# EAGLE board DCCInterfaceShieldNano (EAGLE 9.6.2)
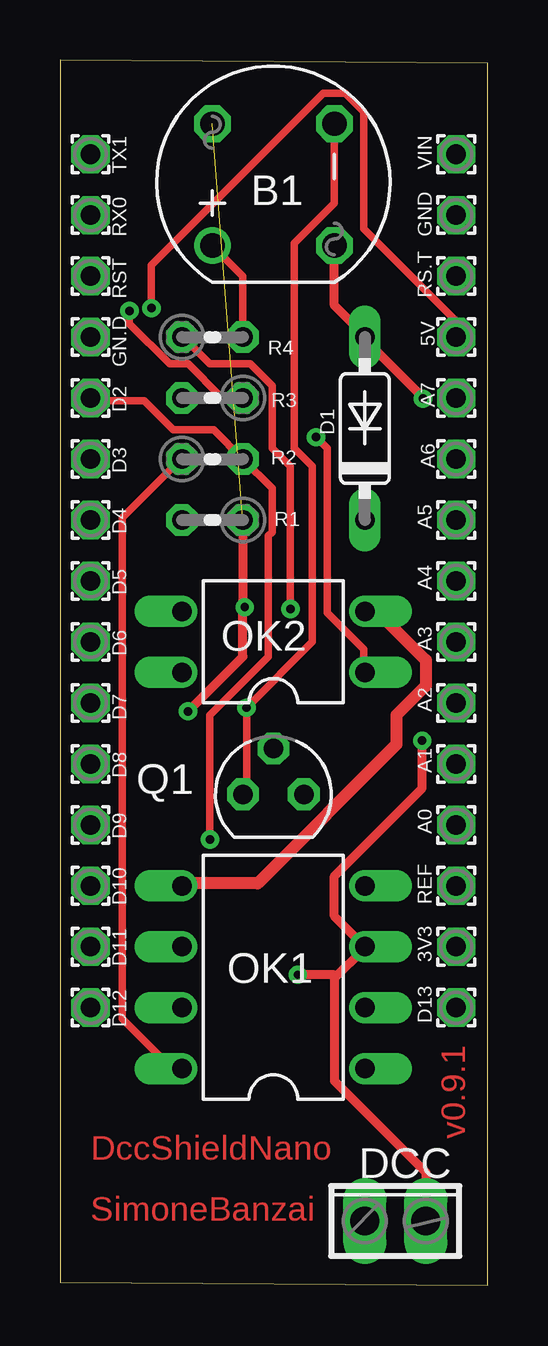
[diagram p0: board, top side]
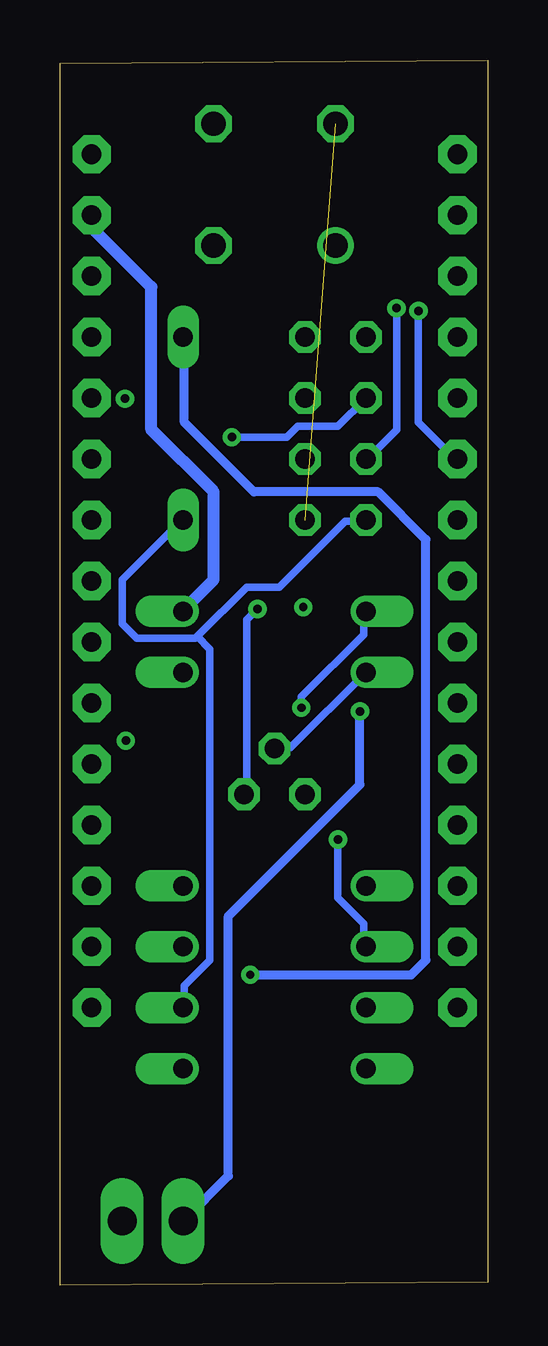
[diagram p1: board, bottom side, seen from below]

Size 17.83 x 51.04 mm. Coordinates in mm from the lower left corner, seen from the top.
Outline: 0,0.13 17.83,0 17.83,50.92 0,51.04 0,0.13
Copper layers (1*16): Top 0.035mm / dielectric 1.5mm / Bottom 0.035mm
Design rules "default": minimum track width 6mil, minimum drill 0.35mm, track to track 6mil, track to pad 6mil, pad to pad 6mil, via to via 6mil, smd to smd 6mil, copper to edge 40mil, drill to drill 6mil, minimum pad ring 10mil, minimum via ring 8mil, stop-mask expansion 4mil, vias tented up to drill 0mil, thermal gap 10mil
Net classes: 0 default: width 0.305 mm, clearance 0.305 mm; 1 GND: width 0.508 mm, clearance 0.305 mm; 2 DCC: width 0.381 mm, clearance 0.305 mm

## Footprints (pad centres in the part's own frame; a part is rotated, then mirrored left to right if it is on the bottom)
1,6/0,8 = drill 0.813 pad 1.6 octagon: 1 0,0
RB1A = drill 1.016: + -2.54,2.54 | drill 1.016 octagon: - 2.54,-2.54; AC1 2.54,2.54; AC2 -2.54,-2.54
DO35-7 = drill 0.813 long: A 3.81,0; C -3.81,0
2POL254 = drill 1.2 long: 1 -1.27,0; 2 1.27,0
DIL08 = drill 0.813 offset: 1 -3.81,-3.81; 2 -1.27,-3.81; 3 1.27,-3.81; 4 3.81,-3.81; 5 3.81,3.81; 6 1.27,3.81; 7 -1.27,3.81; 8 -3.81,3.81
DIL04 = drill 0.813 offset: 1 -1.27,-3.81; 2 1.27,-3.81; 3 1.27,3.81; 4 -1.27,3.81
SOT54A = drill 0.813 octagon: B 0,1.905; C -1.27,0; E 1.27,0
0204V = drill 0.813 octagon: 1 -1.27,0; 2 1.27,0

## Placement (x,y rotation side)
3V3  [1,6/0,8]  16.51,14.1 0 top
5V  [1,6/0,8]  16.51,39.5 0 top
A0  [1,6/0,8]  16.51,19.18 0 top
A1  [1,6/0,8]  16.51,21.72 0 top
A2  [1,6/0,8]  16.51,24.26 0 top
A3  [1,6/0,8]  16.51,26.8 0 top
A4  [1,6/0,8]  16.51,29.34 0 top
A5  [1,6/0,8]  16.51,31.88 0 top
A6  [1,6/0,8]  16.51,34.42 0 top
A7  [1,6/0,8]  16.51,36.96 0 top
B1  [RB1A]  8.89,45.85 90 top
D1  1N4148DO35-7  [DO35-7]  12.7,35.69 90 top
D2  [1,6/0,8]  1.27,36.96 0 top
D3  [1,6/0,8]  1.27,34.42 0 top
D4  [1,6/0,8]  1.27,31.88 0 top
D5  [1,6/0,8]  1.27,29.34 0 top
D6  [1,6/0,8]  1.27,26.8 0 top
D7  [1,6/0,8]  1.27,24.26 0 top
D8  [1,6/0,8]  1.27,21.72 0 top
D9  [1,6/0,8]  1.27,19.18 0 top
D10  [1,6/0,8]  1.27,16.64 0 top
D11  [1,6/0,8]  1.27,14.1 0 top
D12  [1,6/0,8]  1.27,11.56 0 top
D13  [1,6/0,8]  16.51,11.56 0 top
DCC  [2POL254]  13.97,2.67 0 top
GN.D  [1,6/0,8]  1.27,39.5 0 top
GND  [1,6/0,8]  16.51,44.58 0 top
OK1  6N137  [DIL08]  8.89,12.83 90 top
OK2  PC817  [DIL04]  8.89,26.8 90 top
Q1  BC557  [SOT54A]  8.89,20.45 0 top
R1  1k5  [0204V]  6.35,31.88 180 top
R2  10k  [0204V]  6.35,34.42 0 top
R3  10k  [0204V]  6.35,36.96 180 top
R4  100  [0204V]  6.35,39.5 0 top
REF  [1,6/0,8]  16.51,16.64 0 top
RS.T  [1,6/0,8]  16.51,42.04 0 top
RST  [1,6/0,8]  1.27,42.04 0 top
RX0  [1,6/0,8]  1.27,44.58 0 top
TX1  [1,6/0,8]  1.27,47.12 0 top
VIN  [1,6/0,8]  16.51,47.12 0 top

## Library data of the parts
3V3 5V A0 A1-A7 D2-D13 GN.D GND REF RS.T RST RX0 TX1 VIN = wirepad
B1 = rectifier
D1 = diode
DCC = con-phoenix-254; OC_FARNELL: unknown; OC_NEWARK: unknown
OK1 = optocoupler; MPN: 6N137; OC_FARNELL: 1328376; OC_NEWARK: 52M1895
OK2 = optocoupler; MPN: PC817X4J000F; OC_FARNELL: 9707727; OC_NEWARK: 97K7059
Q1 = transistor-small-signal
R1-R4 = rcl; SPICEPREFIX: R

## Nets
GND [GND]: GND.1 OK1.5 OK2.2
N$1: 5V.1 OK1.8 R2.1
N$3: D1.C OK1.2 R1.2
N$5: D2.1 OK1.6 R2.2
N$6 [DCC]: B1.AC1 DCC.1 R1.1
N$7: OK2.1 R3.2
N$8: OK2.4 Q1.B
N$9: B1.+ R4.2
N$10: B1.- OK2.3 Q1.C
N$11: Q1.E R4.1
N$12: D3.1 R3.1
N$13 [DCC]: B1.AC2 D1.A DCC.2 OK1.3

## Tracks (layer width: path | path; a pad name or v marks a point on that pad's centre or on a via)
GND
  Top 0.508: OK1.5 5.18,16.74 8.23,16.74 14.02,22.53 14.02,23.75 15.24,24.97 15.24,26.04 13.26,28.02 12.8,28.02 OK2.2
  Bottom 0.508: GND.1 16.46,44.47 16.46,44.02 14.02,41.58 14.02,35.64 11.43,33.05 11.43,29.39 12.65,28.17 OK2.2
N$1  (via drill 0.35)
  Top 0.305: OK1.8 5.03,9.12 4.57,9.12 2.59,11.1 2.59,31.98 5.03,34.42 R2.1 | v3.81,40.7 3.81,42.49 10.97,49.66 11.89,49.66 12.65,48.89 12.65,44.02 16.46,40.21 16.46,39.6 5V.1
  Bottom 0.305: v3.81,40.7 3.81,35.64 5.03,34.42 R2.1
N$3
  Bottom 0.305: 12.12,27.03 12.19,26.95 14.63,26.95 15.24,27.56 15.24,29.39 12.8,31.83 D1.C | 12.12,27.03 10.06,29.08 8.69,29.08 5.94,31.83 5.18,31.83 R1.2 | 12.12,27.03 11.58,26.49 11.58,13.54 12.65,12.47 12.65,11.56 OK1.2
N$5  (via drill 0.35)
  Top 0.305: v6.25,18.57 6.25,23.75 8.69,26.19 8.69,31.22 8.84,31.37 8.84,33.2 R2.2 6.4,35.64 4.72,35.64 3.5,36.86 1.37,36.86 D2.1
  Bottom 0.305: v6.25,18.57 6.25,16.13 5.18,15.06 5.18,14.15 OK1.6
N$6  (via drill 0.35)  (1 unrouted)
  Top 0.381: R1.1 7.62,28.32 v7.7,28.25 7.62,28.17 7.62,26.19 v5.33,23.9
  Bottom 0.381: v5.33,23.9 5.33,20.85 10.82,15.37 10.82,4.55 DCC.1
N$7  (via drill 0.35)
  Top 0.305: v10.67,35.33 11.12,34.87 11.12,28.02 12.65,26.49 12.65,25.58 OK2.1
  Bottom 0.305: v10.67,35.33 8.38,35.33 7.92,35.79 6.25,35.79 R3.2
N$8
  Bottom 0.305: OK2.4 8.23,22.38 8.84,22.38 Q1.B
N$9
  Top 0.305: R4.2 7.62,42.04 B1.+
N$10  (via drill 0.35)
  Top 0.305: Q1.C 7.62,20.55 7.77,20.7 v7.77,24.05 10.52,26.8 10.52,34.11 9.75,34.87 9.75,43.41 11.43,45.08 B1.-
  Bottom 0.305: v7.77,24.05 7.77,24.51 5.18,27.1 5.18,28.02 OK2.3
N$11  (via drill 0.35)
  Top 0.305: v9.6,28.17 9.6,34.11 8.84,34.87 8.84,37.47 7.92,38.38 6.25,38.38 5.18,39.45 R4.1
  Bottom 0.305: v9.6,28.17 10.06,27.71 10.06,20.55 Q1.E
N$12  (via drill 0.35)
  Top 0.305: v2.9,40.59 2.9,40.06 4.57,38.38 5.33,38.38 6.71,37.01 7.62,37.01 R3.1
  Bottom 0.305: v2.9,40.59 2.9,35.94 1.37,34.42 D3.1
N$13  (via drill 0.35)
  Top 0.381: v15.13,36.93 15.09,37.01 12.65,39.45 D1.A 12.65,39.6 11.43,40.82 B1.AC2 | v15.09,22.68 15.09,20.7 11.43,17.04 11.43,15.37 OK1.3 12.65,14 11.43,12.78 | DCC.2 15.24,4.7 11.43,8.51 11.43,12.78 | v9.91,12.93 11.43,12.93 11.43,12.78
  Bottom 0.381: v9.91,12.93 3.2,12.93 2.59,13.54 2.59,31.06 4.57,33.05 9.75,33.05 12.65,35.94 12.65,39.45 D1.A

## Text on the board
Top: v0.9.1 | DccShieldNano | SimoneBanzai